# EAGLE board SparkFun_Thermocouple_Breakout_Panel_v10 (EAGLE 7.2.0)
DESIGNER: Brent Wilkins; VERSION: v10
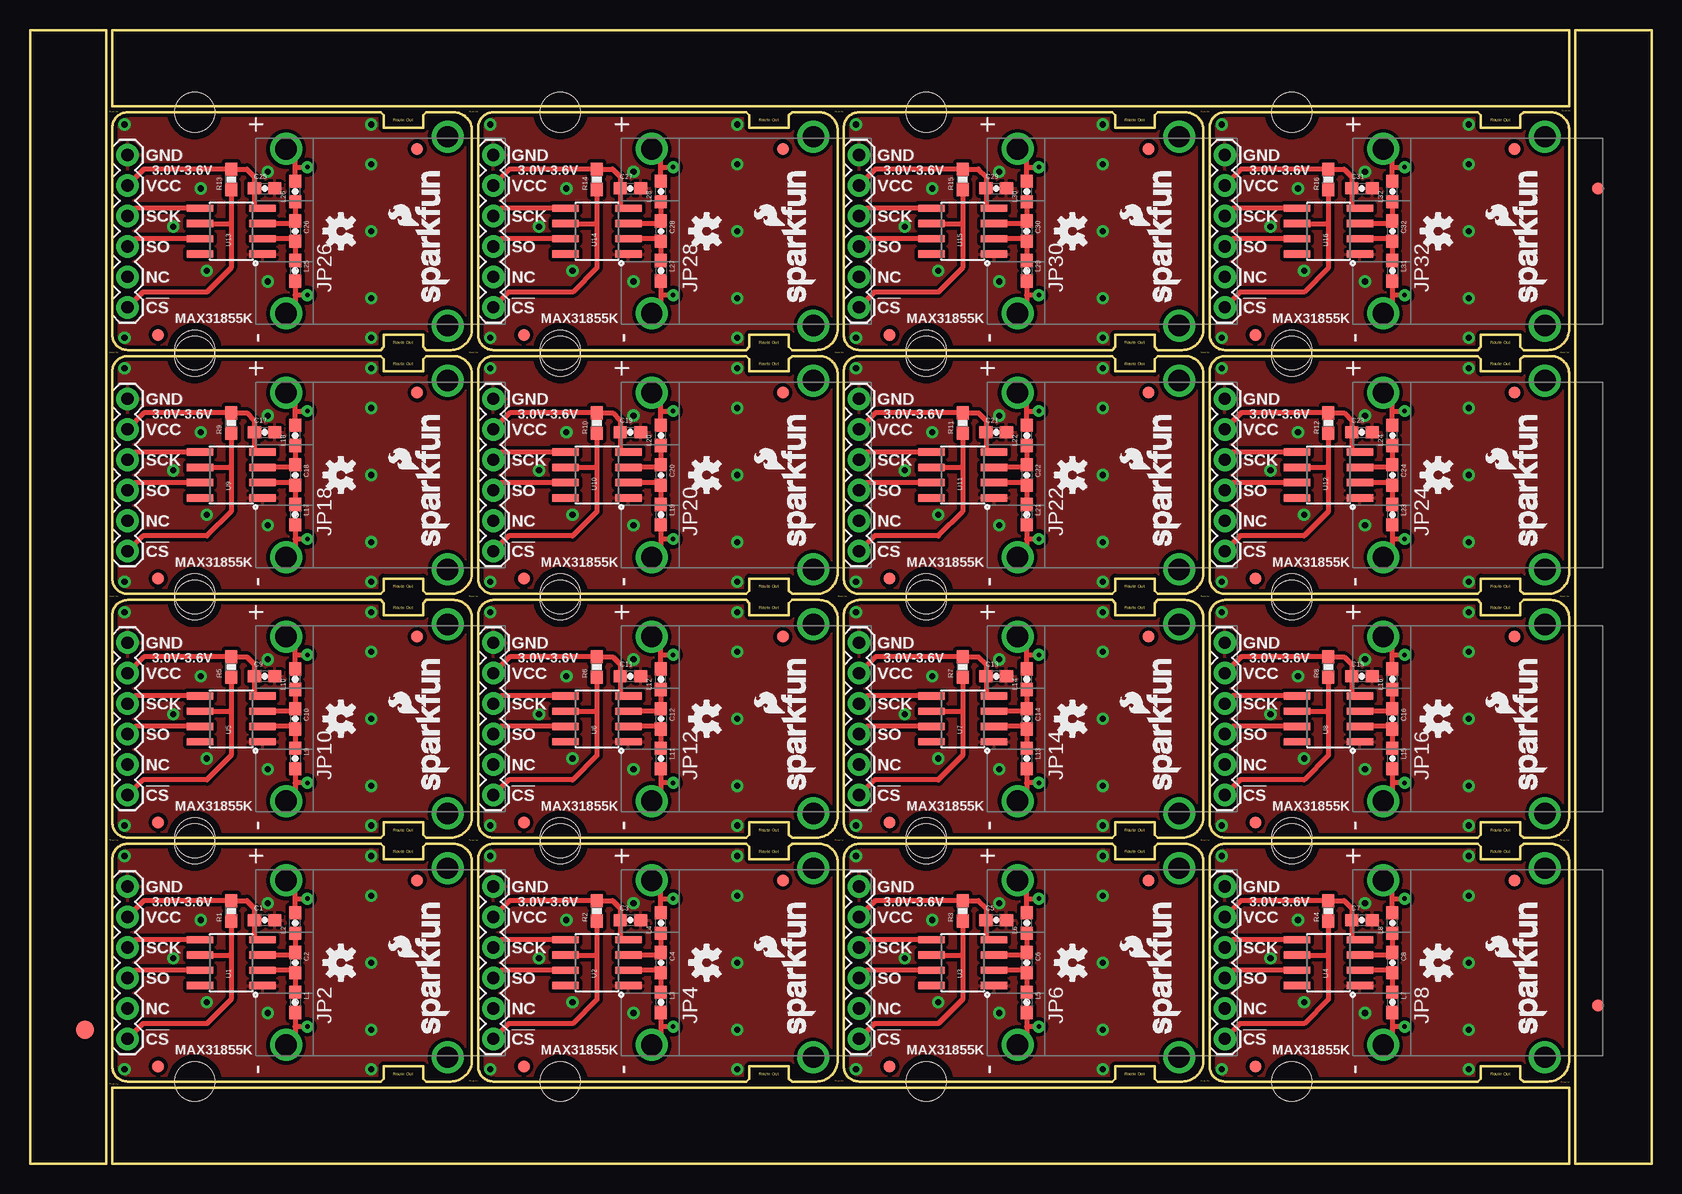
[diagram p0: board, top side]
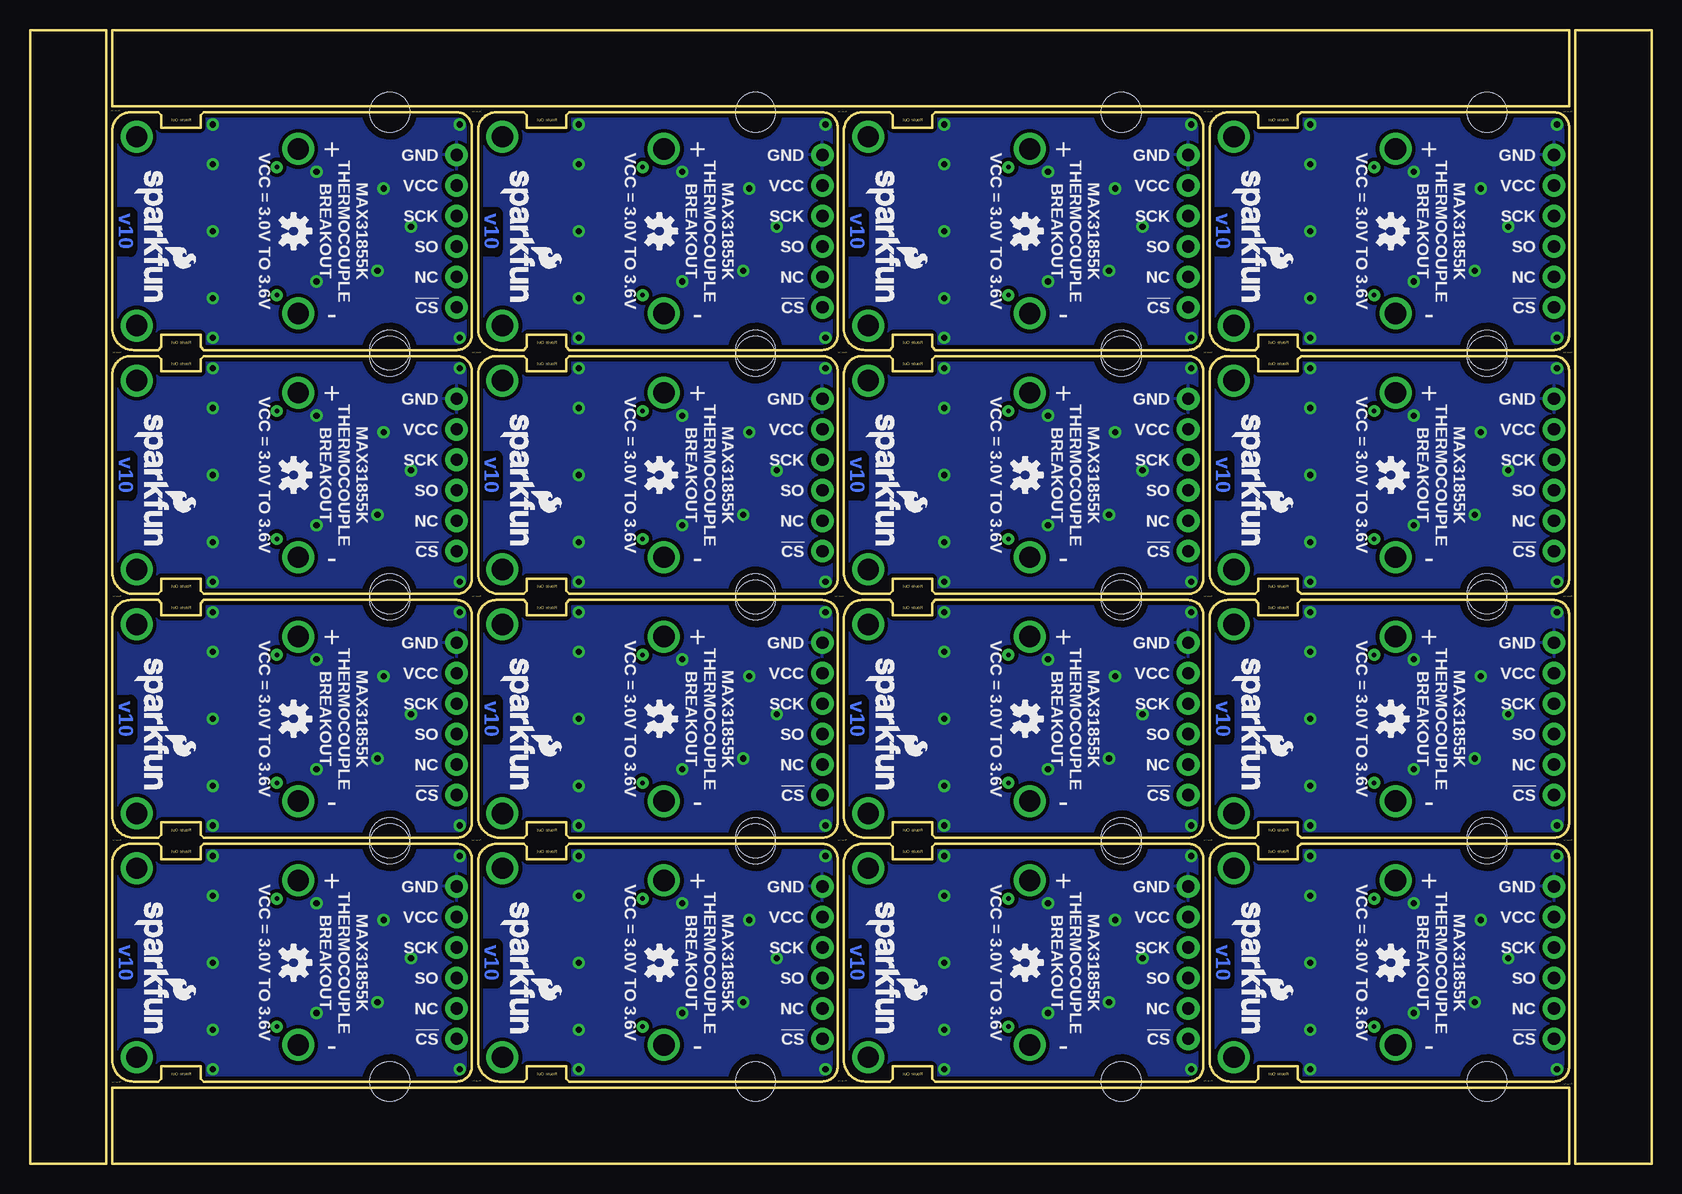
[diagram p1: board, bottom side, seen from below]

Size 135.13 x 94.49 mm. Coordinates in mm from the lower left corner, seen from the top.
Outline: 340 segments
Copper layers (1*16): Top 0.035mm / dielectric 1.5mm / Bottom 0.035mm
Design rules "SparkFun-2-layer": minimum track width 7mil, minimum drill 15mil, track to track 8mil, track to pad 8mil, pad to pad 8mil, via to via 8mil, smd to smd 8mil, copper to edge 8mil, drill to drill 8mil, minimum pad ring 12mil, minimum via ring 10mil, stop-mask expansion 4mil, vias tented up to drill 20mil, thermal gap 10mil
tRestrict: area 19.6,15.2 to 20.1,15.7; area 50,15.2 to 50.5,15.7; area 80.5,15.2 to 81,15.7; area 111,15.2 to 111.5,15.7; area 19.6,35.6 to 20.1,36.1; area 50,35.6 to 50.5,36.1; area 80.5,35.6 to 81,36.1; area 111,35.6 to 111.5,36.1; area 19.6,55.9 to 20.1,56.4; area 50,55.9 to 50.5,56.4; area 80.5,55.9 to 81,56.4; area 111,55.9 to 111.5,56.4; 4 more areas
bRestrict: area 35.3,15.1 to 36.8,18.3; area 65.8,15.1 to 67.3,18.3; area 96.3,15.1 to 97.8,18.3; area 126.7,15.1 to 128.3,18.3; area 35.3,35.4 to 36.8,38.6; area 65.8,35.4 to 67.3,38.6; area 96.3,35.4 to 97.8,38.6; area 126.7,35.4 to 128.3,38.6; area 35.3,55.8 to 36.8,58.9; area 65.8,55.8 to 67.3,58.9; area 96.3,55.8 to 97.8,58.9; area 126.7,55.8 to 128.3,58.9; 4 more areas

## Footprints (pad centres in the part's own frame; a part is rotated, then mirrored left to right if it is on the bottom)
0603-CAP = smd 1.1 x 1: 1 -0.85,0; 2 0.85,0
FIDUCIAL-1.5X3 = smd 1.5 x 1.5: 1 0,0
FIDUCIAL-1X2 = smd 1 x 1: 1 0,0
1X06 = drill 1.016 pad 1.88: 1 0,0; 2 2.54,0; 3 5.08,0; 4 7.62,0; 5 10.16,0; 6 12.7,0
PCC-SMP = drill 1.778: + 6.858,0; - -6.858,0; CLIP1 -7.874,-13.462; CLIP2 7.874,-13.462
0603 = smd 1.1 x 1: 1 -0.85,0; 2 0.85,0
0603-RES = smd 1.1 x 1: 1 -0.85,0; 2 0.85,0
STAND-OFF = hole 3.302: 0,0
TP_15TH = drill 0.381 pad 0.61: P$1 0,0
SOIC8 = smd 0.61 x 2.21: 1 -1.905,-2.616; 2 -0.635,-2.616; 3 0.635,-2.616; 4 1.905,-2.616; 5 1.905,2.616; 6 0.635,2.616; 7 -0.635,2.616; 8 -1.905,2.616

## Placement (x,y rotation side)
C1  0.1uF  [0603-CAP]  19.56,20.32 0 top
C2  10nF  [0603-CAP]  22.1,16.76 270 top
C3  0.1uF  [0603-CAP]  50.04,20.32 0 top
C4  10nF  [0603-CAP]  52.58,16.76 270 top
C5  0.1uF  [0603-CAP]  80.52,20.32 0 top
C6  10nF  [0603-CAP]  83.06,16.76 270 top
C7  0.1uF  [0603-CAP]  111,20.32 0 top
C8  10nF  [0603-CAP]  113.54,16.76 270 top
C9  0.1uF  [0603-CAP]  19.56,40.64 0 top
C10  10nF  [0603-CAP]  22.1,37.08 270 top
C11  0.1uF  [0603-CAP]  50.04,40.64 0 top
C12  10nF  [0603-CAP]  52.58,37.08 270 top
C13  0.1uF  [0603-CAP]  80.52,40.64 0 top
C14  10nF  [0603-CAP]  83.06,37.08 270 top
C15  0.1uF  [0603-CAP]  111,40.64 0 top
C16  10nF  [0603-CAP]  113.54,37.08 270 top
C17  0.1uF  [0603-CAP]  19.56,60.96 0 top
C18  10nF  [0603-CAP]  22.1,57.4 270 top
C19  0.1uF  [0603-CAP]  50.04,60.96 0 top
C20  10nF  [0603-CAP]  52.58,57.4 270 top
C21  0.1uF  [0603-CAP]  80.52,60.96 0 top
C22  10nF  [0603-CAP]  83.06,57.4 270 top
C23  0.1uF  [0603-CAP]  111,60.96 0 top
C24  10nF  [0603-CAP]  113.54,57.4 270 top
C25  0.1uF  [0603-CAP]  19.56,81.28 0 top
C26  10nF  [0603-CAP]  22.1,77.72 270 top
C27  0.1uF  [0603-CAP]  50.04,81.28 0 top
C28  10nF  [0603-CAP]  52.58,77.72 270 top
C29  0.1uF  [0603-CAP]  80.52,81.28 0 top
C30  10nF  [0603-CAP]  83.06,77.72 270 top
C31  0.1uF  [0603-CAP]  111,81.28 0 top
C32  10nF  [0603-CAP]  113.54,77.72 270 top
E$1  [FIDUCIAL-1.5X3]  4.57,11.18 0 top
E$6  [FIDUCIAL-1X2]  130.68,81.28 180 top
E$7  [FIDUCIAL-1X2]  130.68,13.21 0 top
FID1  FIDUCIAL1X2  [FIDUCIAL-1X2]  32.26,23.62 0 top
FID2  FIDUCIAL1X2  [FIDUCIAL-1X2]  10.67,8.13 0 top
FID3  FIDUCIAL1X2  [FIDUCIAL-1X2]  62.74,23.62 0 top
FID4  FIDUCIAL1X2  [FIDUCIAL-1X2]  41.15,8.13 0 top
FID5  FIDUCIAL1X2  [FIDUCIAL-1X2]  93.22,23.62 0 top
FID6  FIDUCIAL1X2  [FIDUCIAL-1X2]  71.63,8.13 0 top
FID7  FIDUCIAL1X2  [FIDUCIAL-1X2]  123.7,23.62 0 top
FID8  FIDUCIAL1X2  [FIDUCIAL-1X2]  102.11,8.13 0 top
FID9  FIDUCIAL1X2  [FIDUCIAL-1X2]  32.26,43.94 0 top
FID10  FIDUCIAL1X2  [FIDUCIAL-1X2]  10.67,28.45 0 top
FID11  FIDUCIAL1X2  [FIDUCIAL-1X2]  62.74,43.94 0 top
FID12  FIDUCIAL1X2  [FIDUCIAL-1X2]  41.15,28.45 0 top
FID13  FIDUCIAL1X2  [FIDUCIAL-1X2]  93.22,43.94 0 top
FID14  FIDUCIAL1X2  [FIDUCIAL-1X2]  71.63,28.45 0 top
FID15  FIDUCIAL1X2  [FIDUCIAL-1X2]  123.7,43.94 0 top
FID16  FIDUCIAL1X2  [FIDUCIAL-1X2]  102.11,28.45 0 top
FID17  FIDUCIAL1X2  [FIDUCIAL-1X2]  32.26,64.26 0 top
FID18  FIDUCIAL1X2  [FIDUCIAL-1X2]  10.67,48.77 0 top
FID19  FIDUCIAL1X2  [FIDUCIAL-1X2]  62.74,64.26 0 top
FID20  FIDUCIAL1X2  [FIDUCIAL-1X2]  41.15,48.77 0 top
FID21  FIDUCIAL1X2  [FIDUCIAL-1X2]  93.22,64.26 0 top
FID22  FIDUCIAL1X2  [FIDUCIAL-1X2]  71.63,48.77 0 top
FID23  FIDUCIAL1X2  [FIDUCIAL-1X2]  123.7,64.26 0 top
FID24  FIDUCIAL1X2  [FIDUCIAL-1X2]  102.11,48.77 0 top
FID25  FIDUCIAL1X2  [FIDUCIAL-1X2]  32.26,84.58 0 top
FID26  FIDUCIAL1X2  [FIDUCIAL-1X2]  10.67,69.09 0 top
FID27  FIDUCIAL1X2  [FIDUCIAL-1X2]  62.74,84.58 0 top
FID28  FIDUCIAL1X2  [FIDUCIAL-1X2]  41.15,69.09 0 top
FID29  FIDUCIAL1X2  [FIDUCIAL-1X2]  93.22,84.58 0 top
FID30  FIDUCIAL1X2  [FIDUCIAL-1X2]  71.63,69.09 0 top
FID31  FIDUCIAL1X2  [FIDUCIAL-1X2]  123.7,84.58 0 top
FID32  FIDUCIAL1X2  [FIDUCIAL-1X2]  102.11,69.09 0 top
JP1  DNP  [1X06]  8.13,23.11 270 top
JP2  PCB_THERMOCOUPLE  [PCC-SMP]  21.34,16.76 90 top
JP3  DNP  [1X06]  38.61,23.11 270 top
JP4  PCB_THERMOCOUPLE  [PCC-SMP]  51.82,16.76 90 top
JP5  DNP  [1X06]  69.09,23.11 270 top
JP6  PCB_THERMOCOUPLE  [PCC-SMP]  82.3,16.76 90 top
JP7  DNP  [1X06]  99.57,23.11 270 top
JP8  PCB_THERMOCOUPLE  [PCC-SMP]  112.78,16.76 90 top
JP9  DNP  [1X06]  8.13,43.43 270 top
JP10  PCB_THERMOCOUPLE  [PCC-SMP]  21.34,37.08 90 top
JP11  DNP  [1X06]  38.61,43.43 270 top
JP12  PCB_THERMOCOUPLE  [PCC-SMP]  51.82,37.08 90 top
JP13  DNP  [1X06]  69.09,43.43 270 top
JP14  PCB_THERMOCOUPLE  [PCC-SMP]  82.3,37.08 90 top
JP15  DNP  [1X06]  99.57,43.43 270 top
JP16  PCB_THERMOCOUPLE  [PCC-SMP]  112.78,37.08 90 top
JP17  DNP  [1X06]  8.13,63.75 270 top
JP18  PCB_THERMOCOUPLE  [PCC-SMP]  21.34,57.4 90 top
JP19  DNP  [1X06]  38.61,63.75 270 top
JP20  PCB_THERMOCOUPLE  [PCC-SMP]  51.82,57.4 90 top
JP21  DNP  [1X06]  69.09,63.75 270 top
JP22  PCB_THERMOCOUPLE  [PCC-SMP]  82.3,57.4 90 top
JP23  DNP  [1X06]  99.57,63.75 270 top
JP24  PCB_THERMOCOUPLE  [PCC-SMP]  112.78,57.4 90 top
JP25  DNP  [1X06]  8.13,84.07 270 top
JP26  PCB_THERMOCOUPLE  [PCC-SMP]  21.34,77.72 90 top
JP27  DNP  [1X06]  38.61,84.07 270 top
JP28  PCB_THERMOCOUPLE  [PCC-SMP]  51.82,77.72 90 top
JP29  DNP  [1X06]  69.09,84.07 270 top
JP30  PCB_THERMOCOUPLE  [PCC-SMP]  82.3,77.72 90 top
JP31  DNP  [1X06]  99.57,84.07 270 top
JP32  PCB_THERMOCOUPLE  [PCC-SMP]  112.78,77.72 90 top
L1  470OHM  [0603]  22.1,13.46 270 top
L2  470OHM  [0603]  22.1,20.07 90 top
L3  470OHM  [0603]  52.58,13.46 270 top
L4  470OHM  [0603]  52.58,20.07 90 top
L5  470OHM  [0603]  83.06,13.46 270 top
L6  470OHM  [0603]  83.06,20.07 90 top
L7  470OHM  [0603]  113.54,13.46 270 top
L8  470OHM  [0603]  113.54,20.07 90 top
L9  470OHM  [0603]  22.1,33.78 270 top
L10  470OHM  [0603]  22.1,40.39 90 top
L11  470OHM  [0603]  52.58,33.78 270 top
L12  470OHM  [0603]  52.58,40.39 90 top
L13  470OHM  [0603]  83.06,33.78 270 top
L14  470OHM  [0603]  83.06,40.39 90 top
L15  470OHM  [0603]  113.54,33.78 270 top
L16  470OHM  [0603]  113.54,40.39 90 top
L17  470OHM  [0603]  22.1,54.1 270 top
L18  470OHM  [0603]  22.1,60.71 90 top
L19  470OHM  [0603]  52.58,54.1 270 top
L20  470OHM  [0603]  52.58,60.71 90 top
L21  470OHM  [0603]  83.06,54.1 270 top
L22  470OHM  [0603]  83.06,60.71 90 top
L23  470OHM  [0603]  113.54,54.1 270 top
L24  470OHM  [0603]  113.54,60.71 90 top
L25  470OHM  [0603]  22.1,74.42 270 top
L26  470OHM  [0603]  22.1,81.03 90 top
L27  470OHM  [0603]  52.58,74.42 270 top
L28  470OHM  [0603]  52.58,81.03 90 top
L29  470OHM  [0603]  83.06,74.42 270 top
L30  470OHM  [0603]  83.06,81.03 90 top
L31  470OHM  [0603]  113.54,74.42 270 top
L32  470OHM  [0603]  113.54,81.03 90 top
LOGO1  OSHW-LOGOS  [OSHW-LOGO-S]  25.91,16.76 90 top
LOGO2  SFE_LOGO_NAME_FLAME.1_INCH  [SFE_LOGO_NAME_FLAME_.1]  35.05,10.41 90 top
LOGO3  SFE_LOGO_NAME_FLAME.1_INCH  [SFE_LOGO_NAME_FLAME_.1]  35.05,22.23 270 bottom
LOGO4  OSHW-LOGOS  [OSHW-LOGO-S]  21.72,16.76 270 bottom
LOGO5  SFE_LOGO_NAME_FLAME.1_INCH  [SFE_LOGO_NAME_FLAME_.1]  65.53,10.41 90 top
LOGO6  OSHW-LOGOS  [OSHW-LOGO-S]  56.39,16.76 90 top
LOGO7  SFE_LOGO_NAME_FLAME.1_INCH  [SFE_LOGO_NAME_FLAME_.1]  65.53,22.23 270 bottom
LOGO8  OSHW-LOGOS  [OSHW-LOGO-S]  52.2,16.76 270 bottom
LOGO9  SFE_LOGO_NAME_FLAME.1_INCH  [SFE_LOGO_NAME_FLAME_.1]  96.01,10.41 90 top
LOGO10  OSHW-LOGOS  [OSHW-LOGO-S]  86.87,16.76 90 top
LOGO11  SFE_LOGO_NAME_FLAME.1_INCH  [SFE_LOGO_NAME_FLAME_.1]  96.01,22.23 270 bottom
LOGO12  OSHW-LOGOS  [OSHW-LOGO-S]  82.68,16.76 270 bottom
LOGO13  SFE_LOGO_NAME_FLAME.1_INCH  [SFE_LOGO_NAME_FLAME_.1]  126.49,10.41 90 top
LOGO14  OSHW-LOGOS  [OSHW-LOGO-S]  117.35,16.76 90 top
LOGO15  SFE_LOGO_NAME_FLAME.1_INCH  [SFE_LOGO_NAME_FLAME_.1]  126.49,22.23 270 bottom
LOGO16  OSHW-LOGOS  [OSHW-LOGO-S]  113.16,16.76 270 bottom
LOGO17  SFE_LOGO_NAME_FLAME.1_INCH  [SFE_LOGO_NAME_FLAME_.1]  35.05,30.73 90 top
LOGO18  OSHW-LOGOS  [OSHW-LOGO-S]  25.91,37.08 90 top
LOGO19  SFE_LOGO_NAME_FLAME.1_INCH  [SFE_LOGO_NAME_FLAME_.1]  35.05,42.55 270 bottom
LOGO20  OSHW-LOGOS  [OSHW-LOGO-S]  21.72,37.08 270 bottom
LOGO21  SFE_LOGO_NAME_FLAME.1_INCH  [SFE_LOGO_NAME_FLAME_.1]  65.53,30.73 90 top
LOGO22  OSHW-LOGOS  [OSHW-LOGO-S]  56.39,37.08 90 top
LOGO23  SFE_LOGO_NAME_FLAME.1_INCH  [SFE_LOGO_NAME_FLAME_.1]  65.53,42.55 270 bottom
LOGO24  OSHW-LOGOS  [OSHW-LOGO-S]  52.2,37.08 270 bottom
LOGO25  SFE_LOGO_NAME_FLAME.1_INCH  [SFE_LOGO_NAME_FLAME_.1]  96.01,30.73 90 top
LOGO26  OSHW-LOGOS  [OSHW-LOGO-S]  86.87,37.08 90 top
LOGO27  SFE_LOGO_NAME_FLAME.1_INCH  [SFE_LOGO_NAME_FLAME_.1]  96.01,42.55 270 bottom
LOGO28  OSHW-LOGOS  [OSHW-LOGO-S]  82.68,37.08 270 bottom
LOGO29  SFE_LOGO_NAME_FLAME.1_INCH  [SFE_LOGO_NAME_FLAME_.1]  126.49,30.73 90 top
LOGO30  OSHW-LOGOS  [OSHW-LOGO-S]  117.35,37.08 90 top
LOGO31  SFE_LOGO_NAME_FLAME.1_INCH  [SFE_LOGO_NAME_FLAME_.1]  126.49,42.55 270 bottom
LOGO32  OSHW-LOGOS  [OSHW-LOGO-S]  113.16,37.08 270 bottom
LOGO33  SFE_LOGO_NAME_FLAME.1_INCH  [SFE_LOGO_NAME_FLAME_.1]  35.05,51.05 90 top
LOGO34  OSHW-LOGOS  [OSHW-LOGO-S]  25.91,57.4 90 top
LOGO35  SFE_LOGO_NAME_FLAME.1_INCH  [SFE_LOGO_NAME_FLAME_.1]  35.05,62.87 270 bottom
LOGO36  OSHW-LOGOS  [OSHW-LOGO-S]  21.72,57.4 270 bottom
LOGO37  SFE_LOGO_NAME_FLAME.1_INCH  [SFE_LOGO_NAME_FLAME_.1]  65.53,51.05 90 top
LOGO38  OSHW-LOGOS  [OSHW-LOGO-S]  56.39,57.4 90 top
LOGO39  SFE_LOGO_NAME_FLAME.1_INCH  [SFE_LOGO_NAME_FLAME_.1]  65.53,62.87 270 bottom
LOGO40  OSHW-LOGOS  [OSHW-LOGO-S]  52.2,57.4 270 bottom
LOGO41  SFE_LOGO_NAME_FLAME.1_INCH  [SFE_LOGO_NAME_FLAME_.1]  96.01,51.05 90 top
LOGO42  OSHW-LOGOS  [OSHW-LOGO-S]  86.87,57.4 90 top
LOGO43  SFE_LOGO_NAME_FLAME.1_INCH  [SFE_LOGO_NAME_FLAME_.1]  96.01,62.87 270 bottom
LOGO44  OSHW-LOGOS  [OSHW-LOGO-S]  82.68,57.4 270 bottom
LOGO45  SFE_LOGO_NAME_FLAME.1_INCH  [SFE_LOGO_NAME_FLAME_.1]  126.49,51.05 90 top
LOGO46  OSHW-LOGOS  [OSHW-LOGO-S]  117.35,57.4 90 top
LOGO47  SFE_LOGO_NAME_FLAME.1_INCH  [SFE_LOGO_NAME_FLAME_.1]  126.49,62.87 270 bottom
LOGO48  OSHW-LOGOS  [OSHW-LOGO-S]  113.16,57.4 270 bottom
LOGO49  SFE_LOGO_NAME_FLAME.1_INCH  [SFE_LOGO_NAME_FLAME_.1]  35.05,71.37 90 top
LOGO50  OSHW-LOGOS  [OSHW-LOGO-S]  25.91,77.72 90 top
LOGO51  SFE_LOGO_NAME_FLAME.1_INCH  [SFE_LOGO_NAME_FLAME_.1]  35.05,83.19 270 bottom
LOGO52  OSHW-LOGOS  [OSHW-LOGO-S]  21.72,77.72 270 bottom
LOGO53  SFE_LOGO_NAME_FLAME.1_INCH  [SFE_LOGO_NAME_FLAME_.1]  65.53,71.37 90 top
LOGO54  OSHW-LOGOS  [OSHW-LOGO-S]  56.39,77.72 90 top
LOGO55  SFE_LOGO_NAME_FLAME.1_INCH  [SFE_LOGO_NAME_FLAME_.1]  65.53,83.19 270 bottom
LOGO56  OSHW-LOGOS  [OSHW-LOGO-S]  52.2,77.72 270 bottom
LOGO57  SFE_LOGO_NAME_FLAME.1_INCH  [SFE_LOGO_NAME_FLAME_.1]  96.01,71.37 90 top
LOGO58  OSHW-LOGOS  [OSHW-LOGO-S]  86.87,77.72 90 top
LOGO59  SFE_LOGO_NAME_FLAME.1_INCH  [SFE_LOGO_NAME_FLAME_.1]  96.01,83.19 270 bottom
LOGO60  OSHW-LOGOS  [OSHW-LOGO-S]  82.68,77.72 270 bottom
LOGO61  SFE_LOGO_NAME_FLAME.1_INCH  [SFE_LOGO_NAME_FLAME_.1]  126.49,71.37 90 top
LOGO62  OSHW-LOGOS  [OSHW-LOGO-S]  117.35,77.72 90 top
LOGO63  SFE_LOGO_NAME_FLAME.1_INCH  [SFE_LOGO_NAME_FLAME_.1]  126.49,83.19 270 bottom
LOGO64  OSHW-LOGOS  [OSHW-LOGO-S]  113.16,77.72 270 bottom
R1  10K  [0603-RES]  16.76,21.08 90 top
R2  10K  [0603-RES]  47.24,21.08 90 top
R3  10K  [0603-RES]  77.72,21.08 90 top
R4  10K  [0603-RES]  108.2,21.08 90 top
R5  10K  [0603-RES]  16.76,41.4 90 top
R6  10K  [0603-RES]  47.24,41.4 90 top
R7  10K  [0603-RES]  77.72,41.4 90 top
R8  10K  [0603-RES]  108.2,41.4 90 top
R9  10K  [0603-RES]  16.76,61.72 90 top
R10  10K  [0603-RES]  47.24,61.72 90 top
R11  10K  [0603-RES]  77.72,61.72 90 top
R12  10K  [0603-RES]  108.2,61.72 90 top
R13  10K  [0603-RES]  16.76,82.04 90 top
R14  10K  [0603-RES]  47.24,82.04 90 top
R15  10K  [0603-RES]  77.72,82.04 90 top
R16  10K  [0603-RES]  108.2,82.04 90 top
STANDOFF1  STAND-OFF  [STAND-OFF]  13.72,6.86 0 top
STANDOFF2  STAND-OFF  [STAND-OFF]  44.2,26.67 0 top
STANDOFF3  STAND-OFF  [STAND-OFF]  44.2,6.86 0 top
STANDOFF4  STAND-OFF  [STAND-OFF]  13.72,26.67 0 top
STANDOFF5  STAND-OFF  [STAND-OFF]  74.68,26.67 0 top
STANDOFF6  STAND-OFF  [STAND-OFF]  74.68,6.86 0 top
STANDOFF7  STAND-OFF  [STAND-OFF]  105.16,26.67 0 top
STANDOFF8  STAND-OFF  [STAND-OFF]  105.16,6.86 0 top
STANDOFF9  STAND-OFF  [STAND-OFF]  13.72,46.99 0 top
STANDOFF10  STAND-OFF  [STAND-OFF]  13.72,27.18 0 top
STANDOFF11  STAND-OFF  [STAND-OFF]  44.2,46.99 0 top
STANDOFF12  STAND-OFF  [STAND-OFF]  44.2,27.18 0 top
STANDOFF13  STAND-OFF  [STAND-OFF]  74.68,46.99 0 top
STANDOFF14  STAND-OFF  [STAND-OFF]  74.68,27.18 0 top
STANDOFF15  STAND-OFF  [STAND-OFF]  105.16,46.99 0 top
STANDOFF16  STAND-OFF  [STAND-OFF]  105.16,27.18 0 top
STANDOFF17  STAND-OFF  [STAND-OFF]  13.72,67.31 0 top
STANDOFF18  STAND-OFF  [STAND-OFF]  13.72,47.5 0 top
STANDOFF19  STAND-OFF  [STAND-OFF]  44.2,67.31 0 top
STANDOFF20  STAND-OFF  [STAND-OFF]  44.2,47.5 0 top
STANDOFF21  STAND-OFF  [STAND-OFF]  74.68,67.31 0 top
STANDOFF22  STAND-OFF  [STAND-OFF]  74.68,47.5 0 top
STANDOFF23  STAND-OFF  [STAND-OFF]  105.16,67.31 0 top
STANDOFF24  STAND-OFF  [STAND-OFF]  105.16,47.5 0 top
STANDOFF25  STAND-OFF  [STAND-OFF]  13.72,87.63 0 top
STANDOFF26  STAND-OFF  [STAND-OFF]  13.72,67.82 0 top
STANDOFF27  STAND-OFF  [STAND-OFF]  44.2,87.63 0 top
STANDOFF28  STAND-OFF  [STAND-OFF]  44.2,67.82 0 top
STANDOFF29  STAND-OFF  [STAND-OFF]  74.68,87.63 0 top
STANDOFF30  STAND-OFF  [STAND-OFF]  74.68,67.82 0 top
STANDOFF31  STAND-OFF  [STAND-OFF]  105.16,87.63 0 top
STANDOFF32  STAND-OFF  [STAND-OFF]  105.16,67.82 0 top
TP1  TEST-POINTTP_15TH_THRU  [TP_15TH]  23.11,22.1 0 top
TP2  TEST-POINTTP_15TH_THRU  [TP_15TH]  23.11,11.43 0 top
TP3  TEST-POINTTP_15TH_THRU  [TP_15TH]  53.59,22.1 0 top
TP4  TEST-POINTTP_15TH_THRU  [TP_15TH]  53.59,11.43 0 top
TP5  TEST-POINTTP_15TH_THRU  [TP_15TH]  84.07,22.1 0 top
TP6  TEST-POINTTP_15TH_THRU  [TP_15TH]  84.07,11.43 0 top
TP7  TEST-POINTTP_15TH_THRU  [TP_15TH]  114.55,22.1 0 top
TP8  TEST-POINTTP_15TH_THRU  [TP_15TH]  114.55,11.43 0 top
TP9  TEST-POINTTP_15TH_THRU  [TP_15TH]  23.11,42.42 0 top
TP10  TEST-POINTTP_15TH_THRU  [TP_15TH]  23.11,31.75 0 top
TP11  TEST-POINTTP_15TH_THRU  [TP_15TH]  53.59,42.42 0 top
TP12  TEST-POINTTP_15TH_THRU  [TP_15TH]  53.59,31.75 0 top
TP13  TEST-POINTTP_15TH_THRU  [TP_15TH]  84.07,42.42 0 top
TP14  TEST-POINTTP_15TH_THRU  [TP_15TH]  84.07,31.75 0 top
TP15  TEST-POINTTP_15TH_THRU  [TP_15TH]  114.55,42.42 0 top
TP16  TEST-POINTTP_15TH_THRU  [TP_15TH]  114.55,31.75 0 top
TP17  TEST-POINTTP_15TH_THRU  [TP_15TH]  23.11,62.74 0 top
TP18  TEST-POINTTP_15TH_THRU  [TP_15TH]  23.11,52.07 0 top
TP19  TEST-POINTTP_15TH_THRU  [TP_15TH]  53.59,62.74 0 top
TP20  TEST-POINTTP_15TH_THRU  [TP_15TH]  53.59,52.07 0 top
TP21  TEST-POINTTP_15TH_THRU  [TP_15TH]  84.07,62.74 0 top
TP22  TEST-POINTTP_15TH_THRU  [TP_15TH]  84.07,52.07 0 top
TP23  TEST-POINTTP_15TH_THRU  [TP_15TH]  114.55,62.74 0 top
TP24  TEST-POINTTP_15TH_THRU  [TP_15TH]  114.55,52.07 0 top
TP25  TEST-POINTTP_15TH_THRU  [TP_15TH]  23.11,83.06 0 top
TP26  TEST-POINTTP_15TH_THRU  [TP_15TH]  23.11,72.39 0 top
TP27  TEST-POINTTP_15TH_THRU  [TP_15TH]  53.59,83.06 0 top
TP28  TEST-POINTTP_15TH_THRU  [TP_15TH]  53.59,72.39 0 top
TP29  TEST-POINTTP_15TH_THRU  [TP_15TH]  84.07,83.06 0 top
TP30  TEST-POINTTP_15TH_THRU  [TP_15TH]  84.07,72.39 0 top
TP31  TEST-POINTTP_15TH_THRU  [TP_15TH]  114.55,83.06 0 top
TP32  TEST-POINTTP_15TH_THRU  [TP_15TH]  114.55,72.39 0 top
U1  MAX31855K  [SOIC8]  16.76,16.76 90 top
U2  MAX31855K  [SOIC8]  47.24,16.76 90 top
U3  MAX31855K  [SOIC8]  77.72,16.76 90 top
U4  MAX31855K  [SOIC8]  108.2,16.76 90 top
U5  MAX31855K  [SOIC8]  16.76,37.08 90 top
U6  MAX31855K  [SOIC8]  47.24,37.08 90 top
U7  MAX31855K  [SOIC8]  77.72,37.08 90 top
U8  MAX31855K  [SOIC8]  108.2,37.08 90 top
U9  MAX31855K  [SOIC8]  16.76,57.4 90 top
U10  MAX31855K  [SOIC8]  47.24,57.4 90 top
U11  MAX31855K  [SOIC8]  77.72,57.4 90 top
U12  MAX31855K  [SOIC8]  108.2,57.4 90 top
U13  MAX31855K  [SOIC8]  16.76,77.72 90 top
U14  MAX31855K  [SOIC8]  47.24,77.72 90 top
U15  MAX31855K  [SOIC8]  77.72,77.72 90 top
U16  MAX31855K  [SOIC8]  108.2,77.72 90 top

## Library data of the parts
C1 C3 C5 C7 C9 C11 C13 C15 C17 C19 C21 C23 C25 C27 C29 C31 = SparkFun-Capacitors; PROD_ID: CAP-00810
C2 C4 C6 C8 C10 C12 C14 C16 C18 C20 C22 C24 C26 C28 C30 C32 = SparkFun-Capacitors; PROD_ID: CAP-00867
E$1 = SparkFun-Retired
E$6 E$7 FID1-FID32 LOGO1-LOGO64 = SparkFun-Aesthetics
JP1 JP3 JP5 JP7 JP9 JP11 JP13 JP15 JP17 JP19 JP21 JP23 JP25 JP27 JP29 JP31 = SparkFun-Connectors; PROD_ID: CONN-08437
JP2 JP4 JP6 JP8 JP10 JP12 JP14 JP16 JP18 JP20 JP22 JP24 JP26 JP28 JP30 JP32 = Testing
L1-L32 = SparkFun-Passives; PROD_ID: NDUC-12579
R1-R16 = SparkFun-Resistors; PROD_ID: RES-00824
STANDOFF1-STANDOFF32 = SparkFun-Electromechanical
TP1-TP32 = SparkFun-Passives
U1-U16 = SparkFun-AnalogIC; PROD_ID: IC-12578

## Nets
GND: C1.2 JP1.1 U1.1
GND1: C3.2 JP3.1 U2.1
GND2: C5.2 JP5.1 U3.1
GND3: C7.2 JP7.1 U4.1
GND4: C9.2 JP9.1 U5.1
GND5: C11.2 JP11.1 U6.1
GND6: C13.2 JP13.1 U7.1
GND7: C15.2 JP15.1 U8.1
GND8: C17.2 JP17.1 U9.1
GND9: C19.2 JP19.1 U10.1
GND10: C21.2 JP21.1 U11.1
GND11: C23.2 JP23.1 U12.1
GND12: C25.2 JP25.1 U13.1
GND13: C27.2 JP27.1 U14.1
GND14: C29.2 JP29.1 U15.1
GND15: C31.2 JP31.1 U16.1
N$1: JP1.3 U1.5
N$2: JP1.4 U1.7
N$3: C2.2 L1.1 U1.2
N$4: JP2.+ L2.2 TP1.P$1
N$5: JP2.- L1.2 TP2.P$1
N$6: C4.1 L4.1 U2.3
N$7: C2.1 L2.1 U1.3
N$8: JP1.6 R1.1 U1.6
N$9: JP3.3 U2.5
N$10: JP3.4 U2.7
N$11: JP3.6 R2.1 U2.6
N$12: C4.2 L3.1 U2.2
N$13: JP4.- L3.2 TP4.P$1
N$14: JP4.+ L4.2 TP3.P$1
N$15: C6.1 L6.1 U3.3
N$16: JP5.3 U3.5
N$17: JP5.4 U3.7
N$18: JP5.6 R3.1 U3.6
N$19: C6.2 L5.1 U3.2
N$20: JP6.- L5.2 TP6.P$1
N$21: JP6.+ L6.2 TP5.P$1
N$22: C8.1 L8.1 U4.3
N$23: JP7.3 U4.5
N$24: JP7.4 U4.7
N$25: JP7.6 R4.1 U4.6
N$26: C8.2 L7.1 U4.2
N$27: JP8.- L7.2 TP8.P$1
N$28: JP8.+ L8.2 TP7.P$1
N$29: C10.1 L10.1 U5.3
N$30: JP9.3 U5.5
N$31: JP9.4 U5.7
N$32: JP9.6 R5.1 U5.6
N$33: C10.2 L9.1 U5.2
N$34: JP10.- L9.2 TP10.P$1
N$35: JP10.+ L10.2 TP9.P$1
N$36: C12.1 L12.1 U6.3
N$37: JP11.3 U6.5
N$38: JP11.4 U6.7
N$39: JP11.6 R6.1 U6.6
N$40: C12.2 L11.1 U6.2
N$41: JP12.- L11.2 TP12.P$1
N$42: JP12.+ L12.2 TP11.P$1
N$43: C14.1 L14.1 U7.3
N$44: JP13.3 U7.5
N$45: JP13.4 U7.7
N$46: JP13.6 R7.1 U7.6
N$47: C14.2 L13.1 U7.2
N$48: JP14.- L13.2 TP14.P$1
N$49: JP14.+ L14.2 TP13.P$1
N$50: C16.1 L16.1 U8.3
N$51: JP15.3 U8.5
N$52: JP15.4 U8.7
N$53: JP15.6 R8.1 U8.6
N$54: C16.2 L15.1 U8.2
N$55: JP16.- L15.2 TP16.P$1
N$56: JP16.+ L16.2 TP15.P$1
N$57: C18.1 L18.1 U9.3
N$58: JP17.3 U9.5
N$59: JP17.4 U9.7
N$60: JP17.6 R9.1 U9.6
N$61: C18.2 L17.1 U9.2
N$62: JP18.- L17.2 TP18.P$1
N$63: JP18.+ L18.2 TP17.P$1
N$64: C20.1 L20.1 U10.3
N$65: JP19.3 U10.5
N$66: JP19.4 U10.7
N$67: JP19.6 R10.1 U10.6
N$68: C20.2 L19.1 U10.2
N$69: JP20.- L19.2 TP20.P$1
N$70: JP20.+ L20.2 TP19.P$1
N$71: C22.1 L22.1 U11.3
N$72: JP21.3 U11.5
N$73: JP21.4 U11.7
N$74: JP21.6 R11.1 U11.6
N$75: C22.2 L21.1 U11.2
N$76: JP22.- L21.2 TP22.P$1
N$77: JP22.+ L22.2 TP21.P$1
N$78: C24.1 L24.1 U12.3
N$79: JP23.3 U12.5
N$80: JP23.4 U12.7
N$81: JP23.6 R12.1 U12.6
N$82: C24.2 L23.1 U12.2
N$83: JP24.- L23.2 TP24.P$1
N$84: JP24.+ L24.2 TP23.P$1
N$85: C26.1 L26.1 U13.3
N$86: JP25.3 U13.5
N$87: JP25.4 U13.7
N$88: JP25.6 R13.1 U13.6
N$89: C26.2 L25.1 U13.2
N$90: JP26.- L25.2 TP26.P$1
N$91: JP26.+ L26.2 TP25.P$1
N$92: C28.1 L28.1 U14.3
N$93: JP27.3 U14.5
N$94: JP27.4 U14.7
N$95: JP27.6 R14.1 U14.6
N$96: C28.2 L27.1 U14.2
N$97: JP28.- L27.2 TP28.P$1
N$98: JP28.+ L28.2 TP27.P$1
N$99: C30.1 L30.1 U15.3
N$100: JP29.3 U15.5
N$101: JP29.4 U15.7
N$102: JP29.6 R15.1 U15.6
N$103: C30.2 L29.1 U15.2
N$104: JP30.- L29.2 TP30.P$1
N$105: JP30.+ L30.2 TP29.P$1
N$106: C32.1 L32.1 U16.3
N$107: JP31.3 U16.5
N$108: JP31.4 U16.7
N$109: JP31.6 R16.1 U16.6
N$110: C32.2 L31.1 U16.2
N$111: JP32.- L31.2 TP32.P$1
N$112: JP32.+ L32.2 TP31.P$1
VCC: C1.1 JP1.2 R1.2 U1.4
VCC1: C3.1 JP3.2 R2.2 U2.4
VCC2: C5.1 JP5.2 R3.2 U3.4
VCC3: C7.1 JP7.2 R4.2 U4.4
VCC4: C9.1 JP9.2 R5.2 U5.4
VCC5: C11.1 JP11.2 R6.2 U6.4
VCC6: C13.1 JP13.2 R7.2 U7.4
VCC7: C15.1 JP15.2 R8.2 U8.4
VCC8: C17.1 JP17.2 R9.2 U9.4
VCC9: C19.1 JP19.2 R10.2 U10.4
VCC10: C21.1 JP21.2 R11.2 U11.4
VCC11: C23.1 JP23.2 R12.2 U12.4
VCC12: C25.1 JP25.2 R13.2 U13.4
VCC13: C27.1 JP27.2 R14.2 U14.4
VCC14: C29.1 JP29.2 R15.2 U15.4
VCC15: C31.1 JP31.2 R16.2 U16.4

## Tracks (layer width: path | path; a pad name or v marks a point on that pad's centre or on a via)
GND  (via drill 0.51)
  other vias: 14.73,13.46 11.94,17.14 14.22,20.32 28.45,25.65 7.87,25.65 7.87,7.87 28.45,7.87 28.45,22.35 28.45,16.76 28.45,11.18 19.81,12.57 19.81,21.72
  pour Top (isolate 0.305, rank 6): 6.86,26.67 36.83,26.67 36.83,6.86 6.86,6.86
  pour Bottom (isolate 0.305, rank 6): 6.86,26.67 36.83,26.67 36.83,6.86 6.86,6.86
GND1  (via drill 0.51)
  other vias: 45.21,13.46 42.42,17.14 44.7,20.32 58.93,25.65 38.35,25.65 38.35,7.87 58.93,7.87 58.93,22.35 58.93,16.76 58.93,11.18 50.29,12.57 50.29,21.72
  pour Top (isolate 0.305, rank 6): 37.34,26.67 67.31,26.67 67.31,6.86 37.34,6.86
  pour Bottom (isolate 0.305, rank 6): 37.34,26.67 67.31,26.67 67.31,6.86 37.34,6.86
GND2  (via drill 0.51)
  other vias: 75.69,13.46 72.9,17.14 75.18,20.32 89.41,25.65 68.83,25.65 68.83,7.87 89.41,7.87 89.41,22.35 89.41,16.76 89.41,11.18 80.77,12.57 80.77,21.72
  pour Top (isolate 0.305, rank 6): 67.82,26.67 97.79,26.67 97.79,6.86 67.82,6.86
  pour Bottom (isolate 0.305, rank 6): 67.82,26.67 97.79,26.67 97.79,6.86 67.82,6.86
GND3  (via drill 0.51)
  other vias: 106.17,13.46 103.38,17.14 105.66,20.32 119.89,25.65 99.31,25.65 99.31,7.87 119.89,7.87 119.89,22.35 119.89,16.76 119.89,11.18 111.25,12.57 111.25,21.72
  pour Top (isolate 0.305, rank 6): 98.3,26.67 128.27,26.67 128.27,6.86 98.3,6.86
  pour Bottom (isolate 0.305, rank 6): 98.3,26.67 128.27,26.67 128.27,6.86 98.3,6.86
GND4  (via drill 0.51)
  other vias: 14.73,33.78 11.94,37.47 14.22,40.64 28.45,45.97 7.87,45.97 7.87,28.19 28.45,28.19 28.45,42.67 28.45,37.08 28.45,31.5 19.81,32.89 19.81,42.04
  pour Top (isolate 0.305, rank 6): 6.86,46.99 36.83,46.99 36.83,27.18 6.86,27.18
  pour Bottom (isolate 0.305, rank 6): 6.86,46.99 36.83,46.99 36.83,27.18 6.86,27.18
GND5  (via drill 0.51)
  other vias: 45.21,33.78 42.42,37.47 44.7,40.64 58.93,45.97 38.35,45.97 38.35,28.19 58.93,28.19 58.93,42.67 58.93,37.08 58.93,31.5 50.29,32.89 50.29,42.04
  pour Top (isolate 0.305, rank 6): 37.34,46.99 67.31,46.99 67.31,27.18 37.34,27.18
  pour Bottom (isolate 0.305, rank 6): 37.34,46.99 67.31,46.99 67.31,27.18 37.34,27.18
GND6  (via drill 0.51)
  other vias: 75.69,33.78 72.9,37.47 75.18,40.64 89.41,45.97 68.83,45.97 68.83,28.19 89.41,28.19 89.41,42.67 89.41,37.08 89.41,31.5 80.77,32.89 80.77,42.04
  pour Top (isolate 0.305, rank 6): 67.82,46.99 97.79,46.99 97.79,27.18 67.82,27.18
  pour Bottom (isolate 0.305, rank 6): 67.82,46.99 97.79,46.99 97.79,27.18 67.82,27.18
GND7  (via drill 0.51)
  other vias: 106.17,33.78 103.38,37.47 105.66,40.64 119.89,45.97 99.31,45.97 99.31,28.19 119.89,28.19 119.89,42.67 119.89,37.08 119.89,31.5 111.25,32.89 111.25,42.04
  pour Top (isolate 0.305, rank 6): 98.3,46.99 128.27,46.99 128.27,27.18 98.3,27.18
  pour Bottom (isolate 0.305, rank 6): 98.3,46.99 128.27,46.99 128.27,27.18 98.3,27.18
GND8  (via drill 0.51)
  other vias: 14.73,54.1 11.94,57.78 14.22,60.96 28.45,66.29 7.87,66.29 7.87,48.51 28.45,48.51 28.45,62.99 28.45,57.4 28.45,51.82 19.81,53.21 19.81,62.36
  pour Top (isolate 0.305, rank 6): 6.86,67.31 36.83,67.31 36.83,47.5 6.86,47.5
  pour Bottom (isolate 0.305, rank 6): 6.86,67.31 36.83,67.31 36.83,47.5 6.86,47.5
GND9  (via drill 0.51)
  other vias: 45.21,54.1 42.42,57.78 44.7,60.96 58.93,66.29 38.35,66.29 38.35,48.51 58.93,48.51 58.93,62.99 58.93,57.4 58.93,51.82 50.29,53.21 50.29,62.36
  pour Top (isolate 0.305, rank 6): 37.34,67.31 67.31,67.31 67.31,47.5 37.34,47.5
  pour Bottom (isolate 0.305, rank 6): 37.34,67.31 67.31,67.31 67.31,47.5 37.34,47.5
GND10  (via drill 0.51)
  other vias: 75.69,54.1 72.9,57.78 75.18,60.96 89.41,66.29 68.83,66.29 68.83,48.51 89.41,48.51 89.41,62.99 89.41,57.4 89.41,51.82 80.77,53.21 80.77,62.36
  pour Top (isolate 0.305, rank 6): 67.82,67.31 97.79,67.31 97.79,47.5 67.82,47.5
  pour Bottom (isolate 0.305, rank 6): 67.82,67.31 97.79,67.31 97.79,47.5 67.82,47.5
GND11  (via drill 0.51)
  other vias: 106.17,54.1 103.38,57.78 105.66,60.96 119.89,66.29 99.31,66.29 99.31,48.51 119.89,48.51 119.89,62.99 119.89,57.4 119.89,51.82 111.25,53.21 111.25,62.36
  pour Top (isolate 0.305, rank 6): 98.3,67.31 128.27,67.31 128.27,47.5 98.3,47.5
  pour Bottom (isolate 0.305, rank 6): 98.3,67.31 128.27,67.31 128.27,47.5 98.3,47.5
GND12  (via drill 0.51)
  other vias: 14.73,74.42 11.94,78.11 14.22,81.28 28.45,86.61 7.87,86.61 7.87,68.83 28.45,68.83 28.45,83.31 28.45,77.72 28.45,72.14 19.81,73.53 19.81,82.68
  pour Top (isolate 0.305, rank 6): 6.86,87.63 36.83,87.63 36.83,67.82 6.86,67.82
  pour Bottom (isolate 0.305, rank 6): 6.86,87.63 36.83,87.63 36.83,67.82 6.86,67.82
GND13  (via drill 0.51)
  other vias: 45.21,74.42 42.42,78.11 44.7,81.28 58.93,86.61 38.35,86.61 38.35,68.83 58.93,68.83 58.93,83.31 58.93,77.72 58.93,72.14 50.29,73.53 50.29,82.68
  pour Top (isolate 0.305, rank 6): 37.34,87.63 67.31,87.63 67.31,67.82 37.34,67.82
  pour Bottom (isolate 0.305, rank 6): 37.34,87.63 67.31,87.63 67.31,67.82 37.34,67.82
GND14  (via drill 0.51)
  other vias: 75.69,74.42 72.9,78.11 75.18,81.28 89.41,86.61 68.83,86.61 68.83,68.83 89.41,68.83 89.41,83.31 89.41,77.72 89.41,72.14 80.77,73.53 80.77,82.68
  pour Top (isolate 0.305, rank 6): 67.82,87.63 97.79,87.63 97.79,67.82 67.82,67.82
  pour Bottom (isolate 0.305, rank 6): 67.82,87.63 97.79,87.63 97.79,67.82 67.82,67.82
GND15  (via drill 0.51)
  other vias: 106.17,74.42 103.38,78.11 105.66,81.28 119.89,86.61 99.31,86.61 99.31,68.83 119.89,68.83 119.89,83.31 119.89,77.72 119.89,72.14 111.25,73.53 111.25,82.68
  pour Top (isolate 0.305, rank 6): 98.3,87.63 128.27,87.63 128.27,67.82 98.3,67.82
  pour Bottom (isolate 0.305, rank 6): 98.3,87.63 128.27,87.63 128.27,67.82 98.3,67.82
N$1
  Top 0.406: U1.5 8.76,18.67 JP1.3
N$2
  Top 0.406: U1.7 8.76,16.13 JP1.4
N$3
  Top 0.406: L1.1 C2.2 21.88,16.13 U1.2
N$4
  Top 0.406: JP2.+ 22.1,22.86 L2.2 22.1,22.1 TP1.P$1
N$5
  Top 0.406: L1.2 22.1,11.43 | 22.1,11.43 22.1,10.67 JP2.- | TP2.P$1 22.1,11.43
N$6
  Top 0.406: L4.1 C4.1 52.36,17.4 U2.3
N$7
  Top 0.406: L2.1 C2.1 21.88,17.4 U1.3
N$8
  Top 0.406: R1.1 16.76,17.53 | 16.76,17.53 16.76,13.72 14.73,11.68 9.4,11.68 JP1.6 | U1.6 16.64,17.4 16.76,17.53
N$9
  Top 0.406: U2.5 39.24,18.67 JP3.3
N$10
  Top 0.406: U2.7 39.24,16.13 JP3.4
N$11
  Top 0.406: R2.1 47.24,17.53 | 47.24,17.53 47.24,13.72 45.21,11.68 39.88,11.68 JP3.6 | U2.6 47.12,17.4 47.24,17.53
N$12
  Top 0.406: L3.1 C4.2 52.36,16.13 U2.2
N$13
  Top 0.406: L3.2 52.58,11.43 | 52.58,11.43 52.58,10.67 JP4.- | TP4.P$1 52.58,11.43
N$14
  Top 0.406: JP4.+ 52.58,22.86 L4.2 52.58,22.1 TP3.P$1
N$15
  Top 0.406: L6.1 C6.1 82.84,17.4 U3.3
N$16
  Top 0.406: U3.5 69.72,18.67 JP5.3
N$17
  Top 0.406: U3.7 69.72,16.13 JP5.4
N$18
  Top 0.406: R3.1 77.72,17.53 | 77.72,17.53 77.72,13.72 75.69,11.68 70.36,11.68 JP5.6 | U3.6 77.6,17.4 77.72,17.53
N$19
  Top 0.406: L5.1 C6.2 82.84,16.13 U3.2
N$20
  Top 0.406: L5.2 83.06,11.43 | 83.06,11.43 83.06,10.67 JP6.- | TP6.P$1 83.06,11.43
N$21
  Top 0.406: JP6.+ 83.06,22.86 L6.2 83.06,22.1 TP5.P$1
N$22
  Top 0.406: L8.1 C8.1 113.32,17.4 U4.3
N$23
  Top 0.406: U4.5 100.2,18.67 JP7.3
N$24
  Top 0.406: U4.7 100.2,16.13 JP7.4
N$25
  Top 0.406: R4.1 108.2,17.53 | 108.2,17.53 108.2,13.72 106.17,11.68 100.84,11.68 JP7.6 | U4.6 108.08,17.4 108.2,17.53
N$26
  Top 0.406: L7.1 C8.2 113.32,16.13 U4.2
N$27
  Top 0.406: L7.2 113.54,11.43 | 113.54,11.43 113.54,10.67 JP8.- | TP8.P$1 113.54,11.43
N$28
  Top 0.406: JP8.+ 113.54,22.86 L8.2 113.54,22.1 TP7.P$1
N$29
  Top 0.406: L10.1 C10.1 21.88,37.72 U5.3
N$30
  Top 0.406: U5.5 8.76,38.99 JP9.3
N$31
  Top 0.406: U5.7 8.76,36.45 JP9.4
N$32
  Top 0.406: R5.1 16.76,37.85 | 16.76,37.85 16.76,34.04 14.73,32 9.4,32 JP9.6 | U5.6 16.64,37.72 16.76,37.85
N$33
  Top 0.406: L9.1 C10.2 21.88,36.45 U5.2
N$34
  Top 0.406: L9.2 22.1,31.75 | 22.1,31.75 22.1,30.99 JP10.- | TP10.P$1 22.1,31.75
N$35
  Top 0.406: JP10.+ 22.1,43.18 L10.2 22.1,42.42 TP9.P$1
N$36
  Top 0.406: L12.1 C12.1 52.36,37.72 U6.3
N$37
  Top 0.406: U6.5 39.24,38.99 JP11.3
N$38
  Top 0.406: U6.7 39.24,36.45 JP11.4
N$39
  Top 0.406: R6.1 47.24,37.85 | 47.24,37.85 47.24,34.04 45.21,32 39.88,32 JP11.6 | U6.6 47.12,37.72 47.24,37.85
N$40
  Top 0.406: L11.1 C12.2 52.36,36.45 U6.2
N$41
  Top 0.406: L11.2 52.58,31.75 | 52.58,31.75 52.58,30.99 JP12.- | TP12.P$1 52.58,31.75
N$42
  Top 0.406: JP12.+ 52.58,43.18 L12.2 52.58,42.42 TP11.P$1
N$43
  Top 0.406: L14.1 C14.1 82.84,37.72 U7.3
N$44
  Top 0.406: U7.5 69.72,38.99 JP13.3
N$45
  Top 0.406: U7.7 69.72,36.45 JP13.4
N$46
  Top 0.406: R7.1 77.72,37.85 | 77.72,37.85 77.72,34.04 75.69,32 70.36,32 JP13.6 | U7.6 77.6,37.72 77.72,37.85
N$47
  Top 0.406: L13.1 C14.2 82.84,36.45 U7.2
N$48
  Top 0.406: L13.2 83.06,31.75 | 83.06,31.75 83.06,30.99 JP14.- | TP14.P$1 83.06,31.75
N$49
  Top 0.406: JP14.+ 83.06,43.18 L14.2 83.06,42.42 TP13.P$1
N$50
  Top 0.406: L16.1 C16.1 113.32,37.72 U8.3
N$51
  Top 0.406: U8.5 100.2,38.99 JP15.3
N$52
  Top 0.406: U8.7 100.2,36.45 JP15.4
N$53
  Top 0.406: R8.1 108.2,37.85 | 108.2,37.85 108.2,34.04 106.17,32 100.84,32 JP15.6 | U8.6 108.08,37.72 108.2,37.85
N$54
  Top 0.406: L15.1 C16.2 113.32,36.45 U8.2
N$55
  Top 0.406: L15.2 113.54,31.75 | 113.54,31.75 113.54,30.99 JP16.- | TP16.P$1 113.54,31.75
N$56
  Top 0.406: JP16.+ 113.54,43.18 L16.2 113.54,42.42 TP15.P$1
N$57
  Top 0.406: L18.1 C18.1 21.88,58.04 U9.3
N$58
  Top 0.406: U9.5 8.76,59.31 JP17.3
N$59
  Top 0.406: U9.7 8.76,56.77 JP17.4
N$60
  Top 0.406: R9.1 16.76,58.17 | 16.76,58.17 16.76,54.36 14.73,52.32 9.4,52.32 JP17.6 | U9.6 16.64,58.04 16.76,58.17
N$61
  Top 0.406: L17.1 C18.2 21.88,56.77 U9.2
N$62
  Top 0.406: L17.2 22.1,52.07 | 22.1,52.07 22.1,51.31 JP18.- | TP18.P$1 22.1,52.07
N$63
  Top 0.406: JP18.+ 22.1,63.5 L18.2 22.1,62.74 TP17.P$1
N$64
  Top 0.406: L20.1 C20.1 52.36,58.04 U10.3
N$65
  Top 0.406: U10.5 39.24,59.31 JP19.3
N$66
  Top 0.406: U10.7 39.24,56.77 JP19.4
N$67
  Top 0.406: R10.1 47.24,58.17 | 47.24,58.17 47.24,54.36 45.21,52.32 39.88,52.32 JP19.6 | U10.6 47.12,58.04 47.24,58.17
N$68
  Top 0.406: L19.1 C20.2 52.36,56.77 U10.2
N$69
  Top 0.406: L19.2 52.58,52.07 | 52.58,52.07 52.58,51.31 JP20.- | TP20.P$1 52.58,52.07
N$70
  Top 0.406: JP20.+ 52.58,63.5 L20.2 52.58,62.74 TP19.P$1
N$71
  Top 0.406: L22.1 C22.1 82.84,58.04 U11.3
N$72
  Top 0.406: U11.5 69.72,59.31 JP21.3
N$73
  Top 0.406: U11.7 69.72,56.77 JP21.4
N$74
  Top 0.406: R11.1 77.72,58.17 | 77.72,58.17 77.72,54.36 75.69,52.32 70.36,52.32 JP21.6 | U11.6 77.6,58.04 77.72,58.17
N$75
  Top 0.406: L21.1 C22.2 82.84,56.77 U11.2
N$76
  Top 0.406: L21.2 83.06,52.07 | 83.06,52.07 83.06,51.31 JP22.- | TP22.P$1 83.06,52.07
N$77
  Top 0.406: JP22.+ 83.06,63.5 L22.2 83.06,62.74 TP21.P$1
N$78
  Top 0.406: L24.1 C24.1 113.32,58.04 U12.3
N$79
  Top 0.406: U12.5 100.2,59.31 JP23.3
N$80
  Top 0.406: U12.7 100.2,56.77 JP23.4
N$81
  Top 0.406: R12.1 108.2,58.17 | 108.2,58.17 108.2,54.36 106.17,52.32 100.84,52.32 JP23.6 | U12.6 108.08,58.04 108.2,58.17
N$82
  Top 0.406: L23.1 C24.2 113.32,56.77 U12.2
N$83
  Top 0.406: L23.2 113.54,52.07 | 113.54,52.07 113.54,51.31 JP24.- | TP24.P$1 113.54,52.07
N$84
  Top 0.406: JP24.+ 113.54,63.5 L24.2 113.54,62.74 TP23.P$1
N$85
  Top 0.406: L26.1 C26.1 21.88,78.36 U13.3
N$86
  Top 0.406: U13.5 8.76,79.63 JP25.3
N$87
  Top 0.406: U13.7 8.76,77.09 JP25.4
N$88
  Top 0.406: R13.1 16.76,78.49 | 16.76,78.49 16.76,74.68 14.73,72.64 9.4,72.64 JP25.6 | U13.6 16.64,78.36 16.76,78.49
N$89
  Top 0.406: L25.1 C26.2 21.88,77.09 U13.2
N$90
  Top 0.406: L25.2 22.1,72.39 | 22.1,72.39 22.1,71.63 JP26.- | TP26.P$1 22.1,72.39
N$91
  Top 0.406: JP26.+ 22.1,83.82 L26.2 22.1,83.06 TP25.P$1
N$92
  Top 0.406: L28.1 C28.1 52.36,78.36 U14.3
N$93
  Top 0.406: U14.5 39.24,79.63 JP27.3
N$94
  Top 0.406: U14.7 39.24,77.09 JP27.4
N$95
  Top 0.406: R14.1 47.24,78.49 | 47.24,78.49 47.24,74.68 45.21,72.64 39.88,72.64 JP27.6 | U14.6 47.12,78.36 47.24,78.49
N$96
  Top 0.406: L27.1 C28.2 52.36,77.09 U14.2
N$97
  Top 0.406: L27.2 52.58,72.39 | 52.58,72.39 52.58,71.63 JP28.- | TP28.P$1 52.58,72.39
N$98
  Top 0.406: JP28.+ 52.58,83.82 L28.2 52.58,83.06 TP27.P$1
N$99
  Top 0.406: L30.1 C30.1 82.84,78.36 U15.3
N$100
  Top 0.406: U15.5 69.72,79.63 JP29.3
N$101
  Top 0.406: U15.7 69.72,77.09 JP29.4
N$102
  Top 0.406: R15.1 77.72,78.49 | 77.72,78.49 77.72,74.68 75.69,72.64 70.36,72.64 JP29.6 | U15.6 77.6,78.36 77.72,78.49
N$103
  Top 0.406: L29.1 C30.2 82.84,77.09 U15.2
N$104
  Top 0.406: L29.2 83.06,72.39 | 83.06,72.39 83.06,71.63 JP30.- | TP30.P$1 83.06,72.39
N$105
  Top 0.406: JP30.+ 83.06,83.82 L30.2 83.06,83.06 TP29.P$1
N$106
  Top 0.406: L32.1 C32.1 113.32,78.36 U16.3
N$107
  Top 0.406: U16.5 100.2,79.63 JP31.3
N$108
  Top 0.406: U16.7 100.2,77.09 JP31.4
N$109
  Top 0.406: R16.1 108.2,78.49 | 108.2,78.49 108.2,74.68 106.17,72.64 100.84,72.64 JP31.6 | U16.6 108.08,78.36 108.2,78.49
N$110
  Top 0.406: L31.1 C32.2 113.32,77.09 U16.2
N$111
  Top 0.406: L31.2 113.54,72.39 | 113.54,72.39 113.54,71.63 JP32.- | TP32.P$1 113.54,72.39
N$112
  Top 0.406: JP32.+ 113.54,83.82 L32.2 113.54,83.06 TP31.P$1
VCC
  Top 0.406: 18.54,20.15 C1.1 | JP1.2 9.49,21.93 R1.2 18.07,21.93 18.71,21.3 C1.1 | C1.1 18.71,18.67 U1.4
VCC1
  Top 0.406: 49.02,20.15 C3.1 | JP3.2 39.97,21.93 R2.2 48.55,21.93 49.19,21.3 C3.1 | C3.1 49.19,18.67 U2.4
VCC2
  Top 0.406: 79.5,20.15 C5.1 | JP5.2 70.45,21.93 R3.2 79.03,21.93 79.67,21.3 C5.1 | C5.1 79.67,18.67 U3.4
VCC3
  Top 0.406: 109.98,20.15 C7.1 | JP7.2 100.93,21.93 R4.2 109.51,21.93 110.15,21.3 C7.1 | C7.1 110.15,18.67 U4.4
VCC4
  Top 0.406: 18.54,40.47 C9.1 | JP9.2 9.49,42.25 R5.2 18.07,42.25 18.71,41.62 C9.1 | C9.1 18.71,38.99 U5.4
VCC5
  Top 0.406: 49.02,40.47 C11.1 | JP11.2 39.97,42.25 R6.2 48.55,42.25 49.19,41.62 C11.1 | C11.1 49.19,38.99 U6.4
VCC6
  Top 0.406: 79.5,40.47 C13.1 | JP13.2 70.45,42.25 R7.2 79.03,42.25 79.67,41.62 C13.1 | C13.1 79.67,38.99 U7.4
VCC7
  Top 0.406: 109.98,40.47 C15.1 | JP15.2 100.93,42.25 R8.2 109.51,42.25 110.15,41.62 C15.1 | C15.1 110.15,38.99 U8.4
VCC8
  Top 0.406: 18.54,60.79 C17.1 | JP17.2 9.49,62.57 R9.2 18.07,62.57 18.71,61.94 C17.1 | C17.1 18.71,59.31 U9.4
VCC9
  Top 0.406: 49.02,60.79 C19.1 | JP19.2 39.97,62.57 R10.2 48.55,62.57 49.19,61.94 C19.1 | C19.1 49.19,59.31 U10.4
VCC10
  Top 0.406: 79.5,60.79 C21.1 | JP21.2 70.45,62.57 R11.2 79.03,62.57 79.67,61.94 C21.1 | C21.1 79.67,59.31 U11.4
VCC11
  Top 0.406: 109.98,60.79 C23.1 | JP23.2 100.93,62.57 R12.2 109.51,62.57 110.15,61.94 C23.1 | C23.1 110.15,59.31 U12.4
VCC12
  Top 0.406: 18.54,81.11 C25.1 | JP25.2 9.49,82.89 R13.2 18.07,82.89 18.71,82.26 C25.1 | C25.1 18.71,79.63 U13.4
VCC13
  Top 0.406: 49.02,81.11 C27.1 | JP27.2 39.97,82.89 R14.2 48.55,82.89 49.19,82.26 C27.1 | C27.1 49.19,79.63 U14.4
VCC14
  Top 0.406: 79.5,81.11 C29.1 | JP29.2 70.45,82.89 R15.2 79.03,82.89 79.67,82.26 C29.1 | C29.1 79.67,79.63 U15.4
VCC15
  Top 0.406: 109.98,81.11 C31.1 | JP31.2 100.93,82.89 R16.2 109.51,82.89 110.15,82.26 C31.1 | C31.1 110.15,79.63 U16.4

## Text on the board
Dimension: Route Out | Route Out | Route Out | Route Out | Route Out | Route Out | Route Out | Route Out | Route Out | Route Out | Route Out | Route Out | Route Out | Route Out | Route Out | Route Out | Route Out | Route Out | Route Out | Route Out | Route Out | Route Out | Route Out | Route Out | Route Out | Route Out | Route Out | Route Out | Route Out | Route Out | Route Out | Route Out | Route Out | Route Out | Route Out | Route Out | Route Out | Route Out | Route Out | Route Out | Route Out | Route Out | Route Out | Route Out | Route Out | Route Out | Route Out | Route Out | Route Out | Route Out | Route Out | Route Out | Route Out | Route Out | Route Out | Route Out | Route Out
tPlace: GND | GND | GND | GND | 3.0V-3.6V | 3.0V-3.6V | 3.0V-3.6V | 3.0V-3.6V | VCC | VCC | VCC | VCC | SCK | SCK | SCK | SCK | SO | SO | SO | SO | NC | NC | NC | NC | !CS | MAX31855K | !CS | MAX31855K | !CS | MAX31855K | !CS | MAX31855K | GND | GND | GND | GND | 3.0V-3.6V | 3.0V-3.6V | 3.0V-3.6V | 3.0V-3.6V | VCC | VCC | VCC | VCC | SCK | SCK | SCK | SCK | SO | SO | SO | SO | NC | NC | NC | NC | !CS | MAX31855K | !CS | MAX31855K | !CS | MAX31855K | !CS | MAX31855K | GND | GND | GND | GND | 3.0V-3.6V | 3.0V-3.6V | 3.0V-3.6V | 3.0V-3.6V | VCC | VCC | VCC | VCC | SCK | SCK | SCK | SCK | SO | SO | SO | SO | NC | NC | NC | NC | !CS | !CS | !CS | !CS | MAX31855K | MAX31855K | MAX31855K | MAX31855K | GND | GND | GND | GND | 3.0V-3.6V | 3.0V-3.6V | 3.0V-3.6V | 3.0V-3.6V | VCC | VCC | VCC | VCC | SCK | SCK | SCK | SCK | SO | SO | SO | SO | NC | NC | NC | NC | !CS | MAX31855K | !CS | MAX31855K | !CS | MAX31855K | !CS | MAX31855K
bPlace: + | + | + | + | GND | GND | GND | GND | VCC | VCC | VCC | VCC | SCK | SCK | SCK | SCK | MAX31855K / THERMOCOUPLE / BREAKOUT | VCC = 3.0V TO 3.6V | MAX31855K / THERMOCOUPLE / BREAKOUT | VCC = 3.0V TO 3.6V | MAX31855K / THERMOCOUPLE / BREAKOUT | VCC = 3.0V TO 3.6V | MAX31855K / THERMOCOUPLE / BREAKOUT | VCC = 3.0V TO 3.6V | SO | SO | SO | SO | NC | NC | NC | NC | !CS | - | !CS | - | !CS | - | !CS | - | GND | + | GND | + | GND | + | GND | + | VCC | VCC | VCC | VCC | SCK | SCK | SCK | SCK | MAX31855K / THERMOCOUPLE / BREAKOUT | VCC = 3.0V TO 3.6V | MAX31855K / THERMOCOUPLE / BREAKOUT | VCC = 3.0V TO 3.6V | MAX31855K / THERMOCOUPLE / BREAKOUT | VCC = 3.0V TO 3.6V | MAX31855K / THERMOCOUPLE / BREAKOUT | VCC = 3.0V TO 3.6V | SO | SO | SO | SO | NC | NC | NC | NC | !CS | - | !CS | - | !CS | - | !CS | - | + | + | + | + | GND | GND | GND | GND | VCC | VCC | VCC | VCC | SCK | SCK | SCK | SCK | MAX31855K / THERMOCOUPLE / BREAKOUT | VCC = 3.0V TO 3.6V | MAX31855K / THERMOCOUPLE / BREAKOUT | VCC = 3.0V TO 3.6V | MAX31855K / THERMOCOUPLE / BREAKOUT | VCC = 3.0V TO 3.6V | MAX31855K / THERMOCOUPLE / BREAKOUT | VCC = 3.0V TO 3.6V | SO | SO | SO | SO | NC | NC | NC | NC | !CS | !CS | !CS | !CS | - | - | - | - | + | + | + | + | GND | GND | GND | GND | VCC | VCC | VCC | VCC | SCK | SCK | SCK | SCK | MAX31855K / THERMOCOUPLE / BREAKOUT | VCC = 3.0V TO 3.6V | MAX31855K / THERMOCOUPLE / BREAKOUT | VCC = 3.0V TO 3.6V | MAX31855K / THERMOCOUPLE / BREAKOUT | VCC = 3.0V TO 3.6V | MAX31855K / THERMOCOUPLE / BREAKOUT | VCC = 3.0V TO 3.6V | SO | SO | SO | SO | NC | NC | NC | NC | !CS | - | !CS | - | !CS | - | !CS | -